# EAGLE board Backplane (EAGLE 9.6.2)
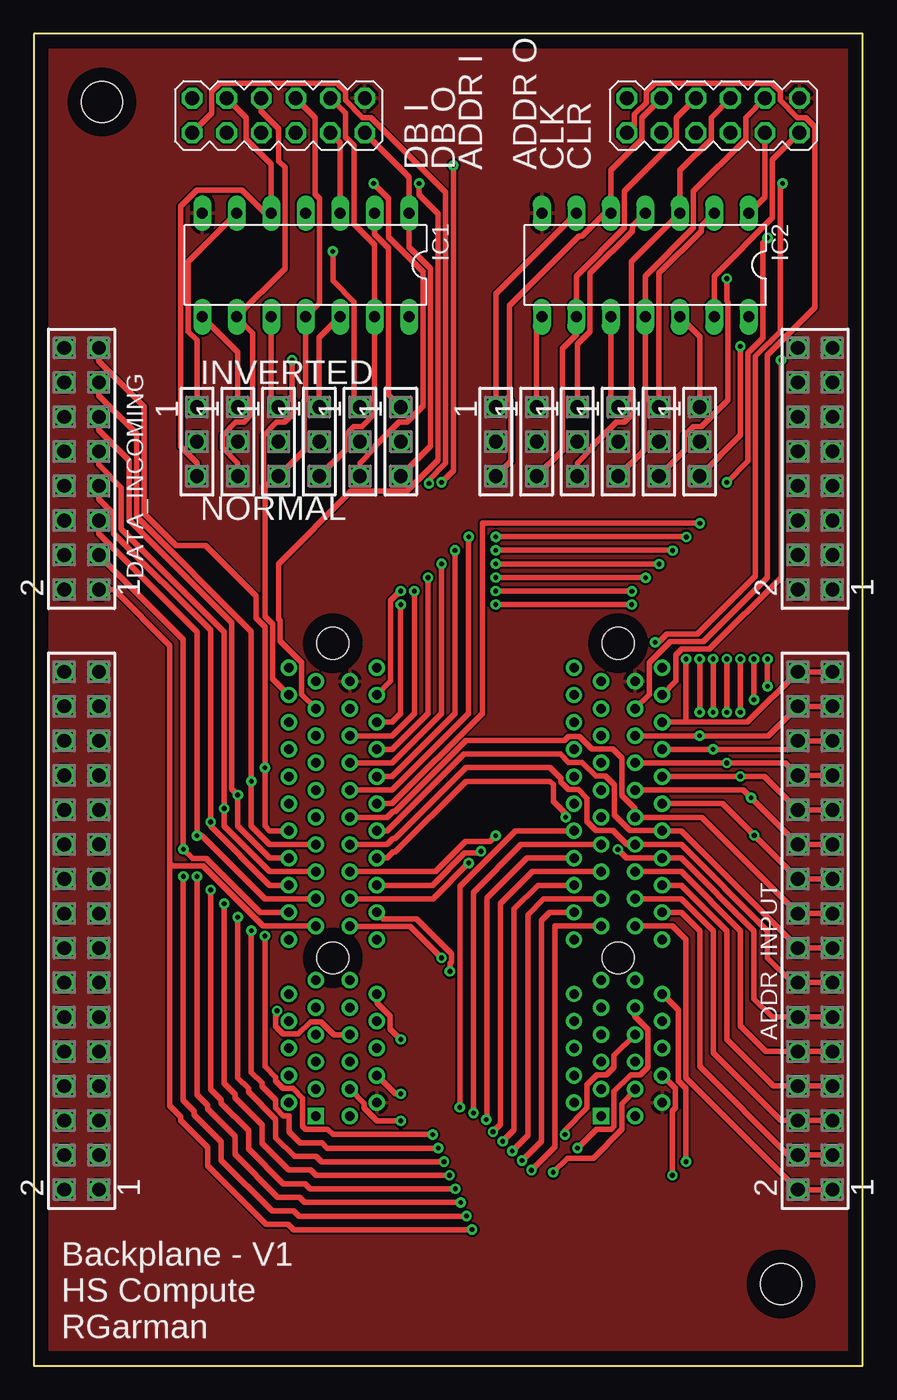
[diagram p0: board, top side]
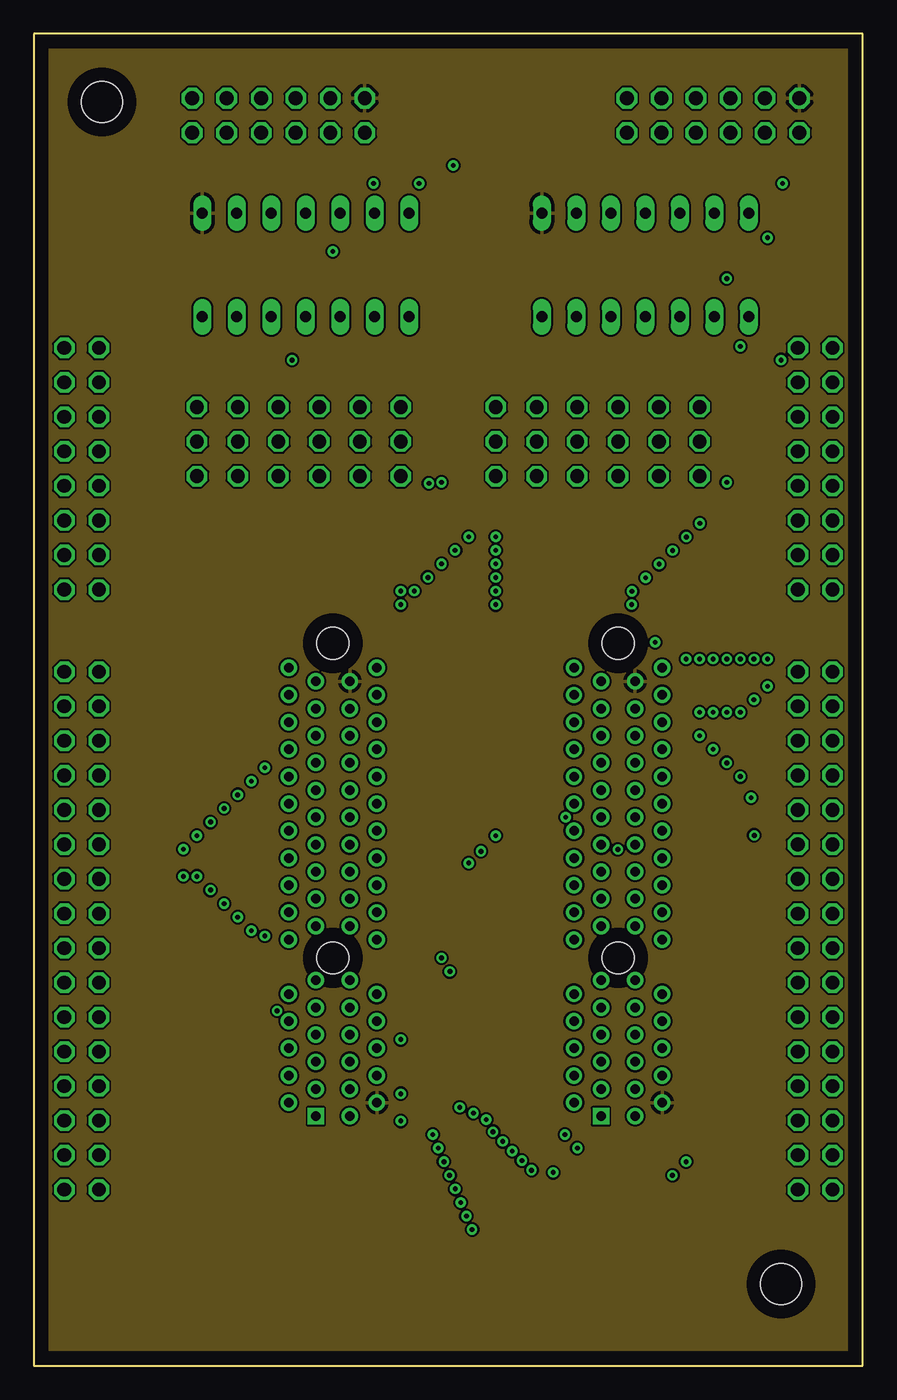
[diagram p1: board, inner layer Route2]
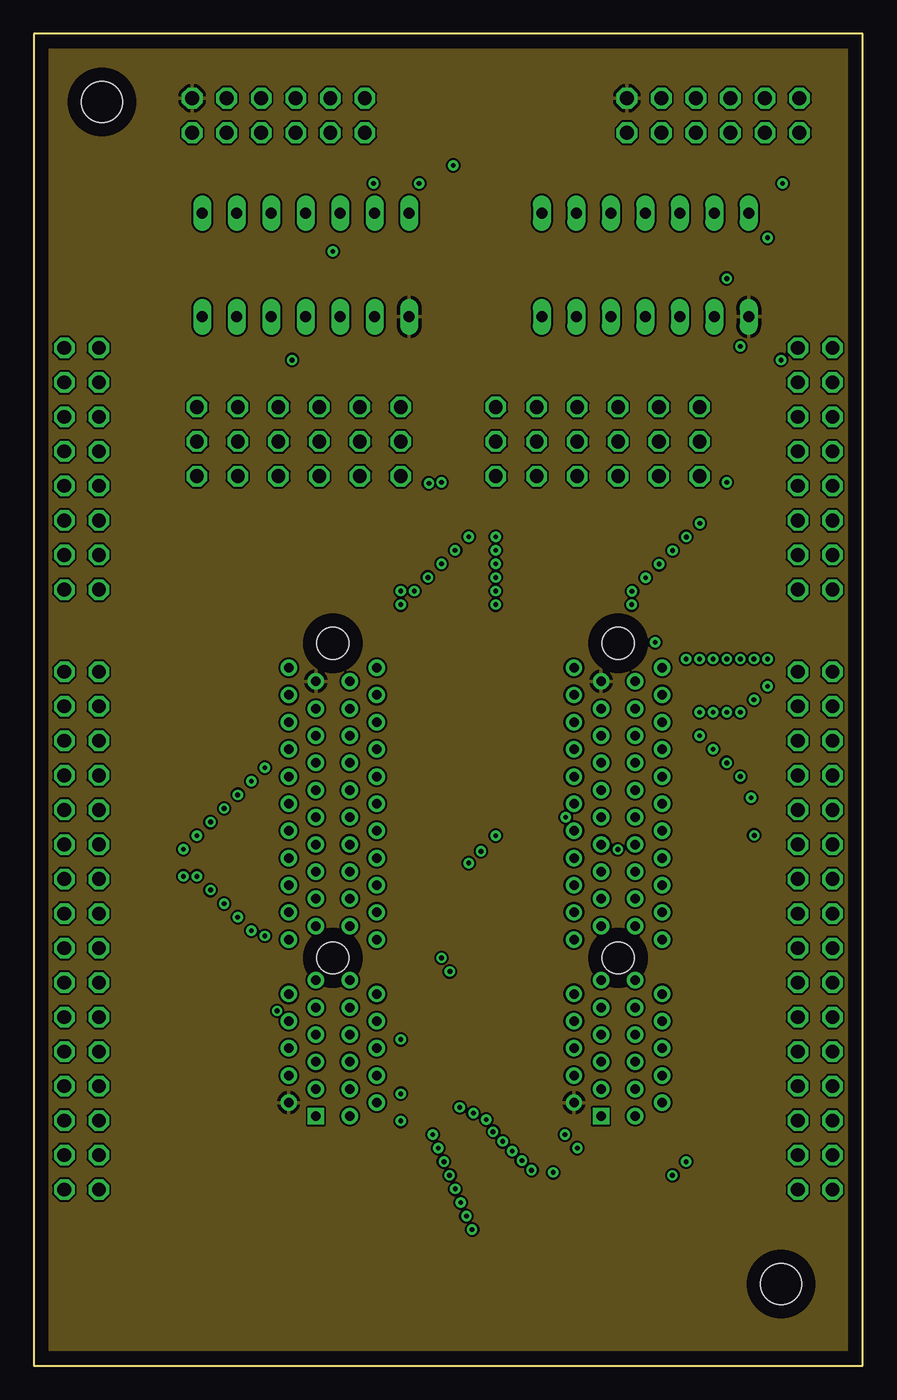
[diagram p2: board, inner layer Route15]
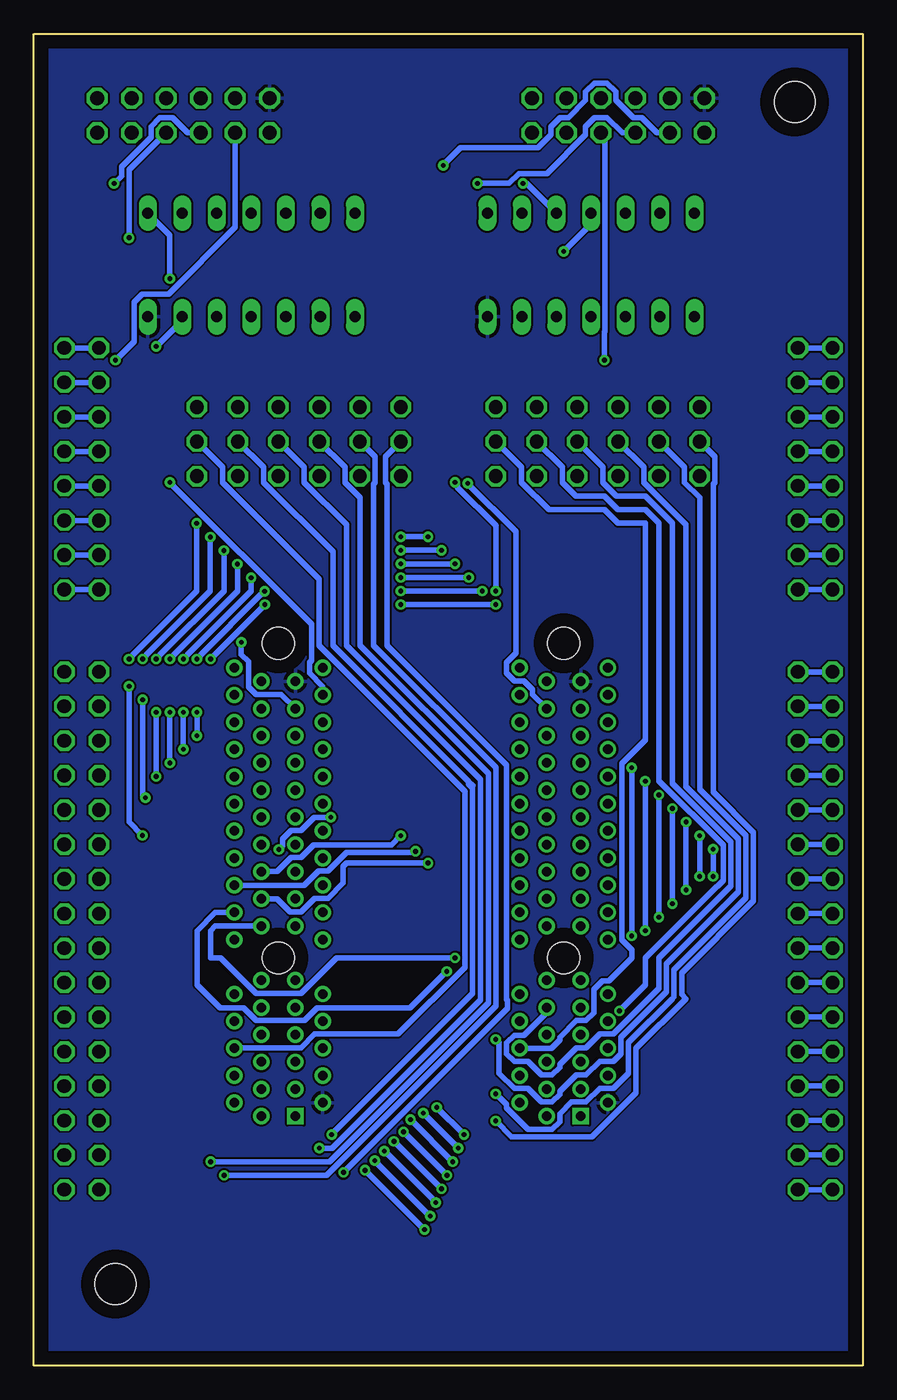
[diagram p3: board, bottom side, seen from below]

Size 61 x 98 mm. Coordinates in mm from the lower left corner, seen from the top.
Outline: 0,0 61,0 61,98 0,98 0,0
Copper layers (1*16): Top 0.035mm / dielectric 1.5mm / Bottom 0.035mm
Design rules "default *": minimum track width 0.2mm, minimum drill 0.35mm, track to track 6mil, track to pad 6mil, pad to pad 6mil, via to via 6mil, smd to smd 6mil, copper to edge 40mil, drill to drill 6mil, minimum pad ring 10mil, minimum via ring 8mil, stop-mask expansion 4mil, vias tented up to drill 0mil, thermal gap 10mil
Net classes: 0 default: width 0.152 mm
Holes 3 mm at 5,93 55,6

## Footprints (pad centres in the part's own frame; a part is rotated, then mirrored left to right if it is on the bottom)
SSW-116-02-G-D = drill 1 pad 1.5 octagon: 1 -19.05,-1.27; 2 -19.05,1.27; 3 -16.51,-1.27; 4 -16.51,1.27; 5 -13.97,-1.27; 6 -13.97,1.27; 7 -11.43,-1.27; 8 -11.43,1.27; 9 -8.89,-1.27; 10 -8.89,1.27; 11 -6.35,-1.27; 12 -6.35,1.27; 13 -3.81,-1.27; 14 -3.81,1.27; 15 -1.27,-1.27; 16 -1.27,1.27; 17 1.27,-1.27; 18 1.27,1.27; 19 3.81,-1.27; 20 3.81,1.27; 21 6.35,-1.27; 22 6.35,1.27; 23 8.89,-1.27; 24 8.89,1.27; 25 11.43,-1.27; 26 11.43,1.27; 27 13.97,-1.27; 28 13.97,1.27; 29 16.51,-1.27; 30 16.51,1.27; 31 19.05,-1.27; 32 19.05,1.27
SSW-103-02-G-S = drill 1 pad 1.5 octagon: 1 -2.54,0; 2 0,0; 3 2.54,0
SSW-108-02-G-D = drill 1 pad 1.5 octagon: 1 -8.89,-1.27; 2 -8.89,1.27; 3 -6.35,-1.27; 4 -6.35,1.27; 5 -3.81,-1.27; 6 -3.81,1.27; 7 -1.27,-1.27; 8 -1.27,1.27; 9 1.27,-1.27; 10 1.27,1.27; 11 3.81,-1.27; 12 3.81,1.27; 13 6.35,-1.27; 14 6.35,1.27; 15 8.89,-1.27; 16 8.89,1.27
DIL14 = drill 0.813 long: 1 -7.62,-3.81; 2 -5.08,-3.81; 3 -2.54,-3.81; 4 0,-3.81; 5 2.54,-3.81; 6 5.08,-3.81; 7 7.62,-3.81; 8 7.62,3.81; 9 5.08,3.81; 10 2.54,3.81; 11 0,3.81; 12 -2.54,3.81; 13 -5.08,3.81; 14 -7.62,3.81
CONTROL_SIG-INT-FOOT = drill 1.016 octagon: ADDR_IN 1.27,1.27; ADDR_OT 3.81,1.27; CLK 3.81,-1.27; CLR 6.35,-1.27; DB_IN -3.81,1.27; DB_OUT -1.27,1.27; GND 6.35,1.27; GP0 -6.35,-1.27; GP1 -3.81,-1.27; GP2 -1.27,-1.27; GP3 1.27,-1.27; VCC -6.35,1.27
PCI_INTERFACE = drill 0.7 square: A1 -11.65,1.25 | drill 0.7: A2 -10.65,3.25; A3 -9.65,1.25; A4 -8.65,3.25; A5 -7.65,1.25; A6 -6.65,3.25; A7 -5.65,1.25; A8 -4.65,3.25; A9 -3.65,1.25; A10 -2.65,3.25; A11 -1.65,1.25; A12 1.35,3.25; A13 2.35,1.25; A14 3.35,3.25; A15 4.35,1.25; A16 5.35,3.25; A17 6.35,1.25; A18 7.35,3.25; A19 8.35,1.25; A20 9.35,3.25; A21 10.35,1.25; A22 11.35,3.25; A23 12.35,1.25; A24 13.35,3.25; A25 14.35,1.25; A26 15.35,3.25; A27 16.35,1.25; A28 17.35,3.25; A29 18.35,1.25; A30 19.35,3.25; A31 20.35,1.25; A32 21.35,3.25; B1 -11.65,-1.25; B2 -10.65,-3.25; B3 -9.65,-1.25; B4 -8.65,-3.25; B5 -7.65,-1.25; B6 -6.65,-3.25; B7 -5.65,-1.25; B8 -4.65,-3.25; B9 -3.65,-1.25; B10 -2.65,-3.25; B11 -1.65,-1.25; B12 1.35,-3.25; B13 2.35,-1.25; B14 3.35,-3.25; B15 4.35,-1.25; B16 5.35,-3.25; B17 6.35,-1.25; B18 7.35,-3.25; B19 8.35,-1.25; B20 9.35,-3.25; B21 10.35,-1.25; B22 11.35,-3.25; B23 12.35,-1.25; B24 13.35,-3.25; B25 14.35,-1.25; B26 15.35,-3.25; B27 16.35,-1.25; B28 17.35,-3.25; B29 18.35,-1.25; B30 19.35,-3.25; B31 20.35,-1.25; B32 21.35,-3.25 | hole 2.35: 0,0; 23.15,0

## Placement (x,y rotation side)
ADDR_INPUT  SSW-116-02-G-D  [SSW-116-02-G-D]  57.5,32 90 top
ADDR_IN~  SSW-103-02-G-S  [SSW-103-02-G-S]  18,68 270 top
ADDR_IN~1  SSW-103-02-G-S  [SSW-103-02-G-S]  40,68 270 top
ADDR_OUT~  SSW-103-02-G-S  [SSW-103-02-G-S]  21,68 270 top
ADDR_OUT~1  SSW-103-02-G-S  [SSW-103-02-G-S]  43,68 270 top
CLK_INV  SSW-103-02-G-S  [SSW-103-02-G-S]  24,68 270 top
CLK_INV1  SSW-103-02-G-S  [SSW-103-02-G-S]  46,68 270 top
CLR_INV  SSW-103-02-G-S  [SSW-103-02-G-S]  27,68 270 top
CLR_INV1  SSW-103-02-G-S  [SSW-103-02-G-S]  49,68 270 top
DATA_INCOMING  SSW-108-02-G-D  [SSW-108-02-G-D]  3.5,66 90 top
DB_IN~  SSW-103-02-G-S  [SSW-103-02-G-S]  12,68 270 top
DB_IN~1  SSW-103-02-G-S  [SSW-103-02-G-S]  34,68 270 top
DB_OUT~  SSW-103-02-G-S  [SSW-103-02-G-S]  15,68 270 top
DB_OUT~1  SSW-103-02-G-S  [SSW-103-02-G-S]  37,68 270 top
IC1  74AC04N  [DIL14]  20,81 180 top
IC2  74AC04N  [DIL14]  45,81 180 top
SIG_FROM_CTRL-  CONTROL_SIG-INT  [CONTROL_SIG-INT-FOOT]  18,92 0 top
SIG_FROM_CTRL-1  CONTROL_SIG-INT  [CONTROL_SIG-INT-FOOT]  50,92 0 top
U$1  BACKPLATE_INTERFACEHEADER  [PCI_INTERFACE]  43,30 90 top
U$2  BACKPLATE_INTERFACEHEADER  [PCI_INTERFACE]  22,30 90 top
X3  SSW-108-02-G-D  [SSW-108-02-G-D]  57.5,66 90 top
X4  SSW-116-02-G-D  [SSW-116-02-G-D]  3.5,32 90 top

## Library data of the parts
ADDR_INPUT X4 = con-samtec; MF: Samtec Inc.; MPN: SSW-116-02-G-D; OC_FARNELL: unknown; OC_NEWARK: 11P9577
ADDR_IN~ ADDR_IN~1 ADDR_OUT~ ADDR_OUT~1 CLK_INV CLK_INV1 CLR_INV CLR_INV1 DB_IN~ DB_IN~1 DB_OUT~ DB_OUT~1 = con-samtec; MF: Samtec Inc.; MPN: SSW-103-02-G-S; OC_FARNELL: unknown; OC_NEWARK: 11P9367
DATA_INCOMING X3 = con-samtec; MF: Samtec Inc.; MPN: SSW-108-02-G-D; OC_FARNELL: unknown; OC_NEWARK: 85K7646
IC1 IC2 = 74xx-eu
SIG_FROM_CTRL- SIG_FROM_CTRL-1 U$1 U$2 = Computer

## Nets
ADDR0: ADDR_INPUT.1 ADDR_INPUT.2 U$1.B13 U$2.B13
ADDR1: ADDR_INPUT.3 ADDR_INPUT.4 U$1.B14 U$2.B14
ADDR2: ADDR_INPUT.5 ADDR_INPUT.6 U$1.B15 U$2.B15
ADDR3: ADDR_INPUT.7 ADDR_INPUT.8 U$1.B16 U$2.B16
ADDR4: ADDR_INPUT.9 ADDR_INPUT.10 U$1.B17 U$2.B17
ADDR5: ADDR_INPUT.11 ADDR_INPUT.12 U$1.B18 U$2.B18
ADDR6: ADDR_INPUT.13 ADDR_INPUT.14 U$1.B19 U$2.B19
ADDR7: ADDR_INPUT.15 ADDR_INPUT.16 U$1.B20 U$2.B20
ADDR8: ADDR_INPUT.17 ADDR_INPUT.18 U$1.B21 U$2.B21
ADDR9: ADDR_INPUT.19 ADDR_INPUT.20 U$1.B22 U$2.B22
ADDR10: ADDR_INPUT.21 ADDR_INPUT.22 U$1.B23 U$2.B23
ADDR11: ADDR_INPUT.23 ADDR_INPUT.24 U$1.B24 U$2.B24
ADDR12: ADDR_INPUT.25 ADDR_INPUT.26 U$1.B25 U$2.B25
ADDR13: ADDR_INPUT.27 ADDR_INPUT.28 U$1.B26 U$2.B26
ADDR14: ADDR_INPUT.29 ADDR_INPUT.30 U$1.B27 U$2.B27
ADDR15: ADDR_INPUT.31 ADDR_INPUT.32 U$1.B28 U$2.B28
DB0: DATA_INCOMING.1 DATA_INCOMING.2 U$1.A13 U$2.A13
DB1: DATA_INCOMING.3 DATA_INCOMING.4 U$1.A14 U$2.A14
DB2: DATA_INCOMING.5 DATA_INCOMING.6 U$1.A15 U$2.A15
DB3: DATA_INCOMING.7 DATA_INCOMING.8 U$1.A16 U$2.A16
DB4: DATA_INCOMING.9 DATA_INCOMING.10 U$1.A17 U$2.A17
DB5: DATA_INCOMING.11 DATA_INCOMING.12 U$1.A18 U$2.A18
DB6: DATA_INCOMING.13 DATA_INCOMING.14 U$1.A19 U$2.A19
DB7: DATA_INCOMING.15 DATA_INCOMING.16 U$1.A20 U$2.A20
GND: IC1.7 IC2.7 SIG_FROM_CTRL-1.GND SIG_FROM_CTRL-.GND U$1.B2 U$1.B31 U$2.B2 U$2.B31
N$1: CLR_INV.2 U$2.B6
N$2: CLR_INV.3 IC1.1 SIG_FROM_CTRL-.CLR
N$3: CLK_INV.2 U$2.B7
N$4: DB_IN~.2 U$2.B3
N$5: DB_OUT~.2 U$2.B4
N$6: SIG_FROM_CTRL-.GP0 U$2.B29
N$7: SIG_FROM_CTRL-.GP1 U$2.B30
N$8: CLK_INV.3 IC1.3 SIG_FROM_CTRL-.CLK
N$9: DB_IN~.3 IC1.5 SIG_FROM_CTRL-.DB_IN
N$10: DB_OUT~.3 IC1.9 SIG_FROM_CTRL-.DB_OUT
N$11: SIG_FROM_CTRL-.GP2 U$2.A29
N$12: SIG_FROM_CTRL-.GP3 U$2.A30
N$13: ADDR_OUT~.3 IC1.13 SIG_FROM_CTRL-.ADDR_OT
N$14: ADDR_IN~.1 IC1.10
N$15: CLR_INV.1 IC1.2
N$16: CLK_INV.1 IC1.4
N$17: DB_IN~.1 IC1.6
N$18: DB_OUT~.1 IC1.8
N$19: ADDR_IN~.3 IC1.11 SIG_FROM_CTRL-.ADDR_IN
N$20: ADDR_OUT~.1 IC1.12
N$21: ADDR_OUT~.2 U$2.B9
N$22: ADDR_IN~.2 U$2.B10
N$33: X3.1 X3.2
N$34: X3.3 X3.4
N$35: X3.5 X3.6
N$36: X3.7 X3.8
N$37: X3.9 X3.10
N$38: X3.11 X3.12
N$39: X3.13 X3.14
N$40: X3.15 X3.16
N$41: X4.1 X4.2
N$42: X4.3 X4.4
N$43: X4.5 X4.6
N$44: X4.7 X4.8
N$45: X4.9 X4.10
N$46: X4.11 X4.12
N$47: X4.13 X4.14
N$48: X4.15 X4.16
N$49: X4.17 X4.18
N$50: X4.19 X4.20
N$51: X4.21 X4.22
N$52: X4.23 X4.24
N$53: X4.25 X4.26
N$54: X4.27 X4.28
N$55: X4.29 X4.30
N$56: X4.31 X4.32
N$57: CLR_INV1.3 IC2.13 SIG_FROM_CTRL-1.CLR
N$58: CLK_INV1.3 IC2.1 SIG_FROM_CTRL-1.CLK
N$59: DB_IN~1.3 IC2.5 SIG_FROM_CTRL-1.DB_IN
N$60: DB_OUT~1.3 IC2.9 SIG_FROM_CTRL-1.DB_OUT
N$61: CLK_INV1.1 IC2.2
N$62: ADDR_IN~1.1 IC2.4
N$63: DB_IN~1.1 IC2.6
N$64: DB_OUT~1.1 IC2.8
N$65: ADDR_OUT~1.3 IC2.11 SIG_FROM_CTRL-1.ADDR_OT
N$66: ADDR_IN~1.3 IC2.3 SIG_FROM_CTRL-1.ADDR_IN
N$67: ADDR_OUT~1.1 IC2.10
N$68: CLR_INV1.1 IC2.12
N$79: CLK_INV1.2 U$1.B7
N$80: CLR_INV1.2 U$1.B6
N$81: DB_IN~1.2 U$1.B3
N$82: DB_OUT~1.2 U$1.B4
N$83: ADDR_OUT~1.2 U$1.B9
N$84: ADDR_IN~1.2 U$1.B10
N$85: SIG_FROM_CTRL-1.GP0 U$1.B29
N$86: SIG_FROM_CTRL-1.GP1 U$1.B30
N$87: SIG_FROM_CTRL-1.GP2 U$1.A29
N$88: SIG_FROM_CTRL-1.GP3 U$1.A30
VCC: IC1.14 IC2.14 SIG_FROM_CTRL-1.VCC SIG_FROM_CTRL-.VCC U$1.A2 U$1.A31 U$2.A2 U$2.A31

## Tracks (layer width: path | path; a pad name or v marks a point on that pad's centre or on a via)
ADDR0  (via drill 0.35)
  Top 0.406: ADDR_INPUT.1 ADDR_INPUT.2 48,21.18 48,31.35 47,32.35 U$1.B13 44.04,32.35 | U$2.B13 23.29,32.31 27.69,32.31 v30,30
  Bottom 0.406: U$1.B13 47.65,32.35 48,32 48,30 47.26,30 44.65,27.39 41.35,27.39 38.74,30 v30,30
ADDR1  (via drill 0.35)
  Top 0.406: U$1.B14 47.65,33.35 49,32 49,22 55.51,15.49 ADDR_INPUT.4 ADDR_INPUT.3 | U$2.B14 25.73,32.87 28.17,32.87 30.73,30.3 30.73,29.7 30.62,29.58 v30.62,29
  Bottom 0.406: U$1.B14 47.65,33.35 49,32 49,28 47.31,26.31 45.57,26.31 44.65,25.39 41.07,25.39 40.15,26.31 35,26.31 34.69,26.31 33.31,26.31 v30.62,29
ADDR2  (via drill 0.35)
  Top 0.406: U$1.B15 47.65,34.35 50,32 50,23 54.97,18.03 ADDR_INPUT.6 ADDR_INPUT.5 | v32,36.98 29.37,34.35 U$2.B15
  Bottom 0.406: U$1.B15 43.11,34.35 42.15,33.39 41.35,33.39 40.35,34.39 39.35,34.39 38.23,35.51 38.23,36.73 37.98,36.98 v32,36.98
ADDR3  (via drill 0.35)
  Top 0.406: ADDR_INPUT.7 ADDR_INPUT.8 54.43,20.57 51,24 51,32 47.65,35.35 U$1.B16 | v32.91,37.84 32.78,37.71 31.7,37.71 29.33,35.35 U$2.B16
  Bottom 0.406: U$1.B16 41.11,35.35 40.07,36.39 39.35,36.39 38.79,36.95 38.79,36.96 38,37.75 33,37.75 v32.91,37.84
ADDR4  (via drill 0.35)
  Top 0.406: U$1.B17 47.65,36.35 52,32 52,25 53.89,23.11 ADDR_INPUT.10 ADDR_INPUT.9 | U$2.B17 29.54,36.35 31.77,38.58 33.58,38.58 v34,39
  Bottom 0.406: U$1.B17 43.11,36.35 42.07,37.39 41.35,37.39 40.43,38.31 34.69,38.31 v34,39
ADDR5  (via drill 0.35)
  Top 0.406: ADDR_INPUT.11 ADDR_INPUT.12 54.35,25.65 53,27 53,32 47.65,37.35 U$1.B18 43.61,37.35 v42.98,37.98 | U$2.B18 26,37.35 26.44,37.79 26.58,37.79 31.79,43 38,43 38.23,42.77 38.23,41.51 39.15,40.6 v39.15,40.35
  Bottom 0.406: v42.98,37.98 42.71,38.25 42.71,38.75 42.07,39.39 41.35,39.39 40.39,40.35 v39.15,40.35
ADDR6
  Top 0.406: ADDR_INPUT.13 ADDR_INPUT.14 55.81,28.19 54,30 54,32 47.65,38.35 U$1.B19 43.65,38.35 42.61,39.39 41.35,39.39 40.71,40.03 40.71,41.75 40.07,42.39 39.35,42.39 38.79,42.95 38.79,43.21 38,44 31.79,44 26.58,38.79 26.44,38.79 26,38.35 U$2.B19
ADDR7
  Top 0.406: ADDR_INPUT.15 ADDR_INPUT.16 56.23,30.77 47.65,39.35 U$1.B20 46.21,39.39 43.85,39.39 42.73,40.51 42.73,42.73 42.07,43.39 41.35,43.39 40.35,44.39 39.35,44.39 38.74,45 31.65,45 26,39.35 U$2.B20
ADDR8
  Top 0.406: ADDR_INPUT.17 ADDR_INPUT.18 49.15,40.35 U$1.B21 44.25,40.99 43.29,41.95 43.29,44.71 42.61,45.39 41.07,45.39 40.15,46.31 39.35,46.31 39.04,46 31.79,46 26.58,40.79 26.44,40.79 26,40.35 U$2.B21
ADDR9  (via drill 0.35)
  Top 0.406: U$1.B22 50.69,41.35 v53.02,39.02 ADDR_INPUT.20 ADDR_INPUT.19 | U$2.B22 26.35,41.35 33,48 33,62 49,62 v49.02,61.98 | v54,50 v54,52
  Bottom 0.406: v53.02,39.02 54,40 v54,50 | v54,52 53.73,52.27 53.73,52.3 49.02,57.02 v49.02,61.98
ADDR10  (via drill 0.35)
  Top 0.406: U$1.B23 52.23,42.35 v52.79,41.79 ADDR_INPUT.22 ADDR_INPUT.21 | U$2.B23 26.35,42.35 32,48 v32,61 | v53,49 v53,52 | v48.02,60.98 48,61 v34,61
  Bottom 0.406: v52.79,41.79 53,42 v53,49 | v32,61 v34,61 | v53,52 52.73,52.27 52.73,52.3 48.02,57.02 v48.02,60.98
ADDR11  (via drill 0.35)
  Top 0.406: U$1.B24 v52,43.35 53.77,43.35 ADDR_INPUT.24 ADDR_INPUT.23 | U$2.B24 26.35,43.35 31,48 v31,60 | v52,48.08 v52,52 | v34,60 47,60 v47.02,59.98
  Bottom 0.406: v52,43.35 v52,48.08 | v52,52 51.73,52.27 51.73,52.3 47.02,57.02 v47.02,59.98 | v31,60 v34,60
ADDR12  (via drill 0.35)
  Top 0.406: U$1.B25 v51,44.35 55.31,44.35 ADDR_INPUT.26 ADDR_INPUT.25 | U$2.B25 26.35,44.35 30,48 v30,59 | v51,48.08 v51,52 | v46.02,58.98 46,59 v34,59
  Bottom 0.406: v51,44.35 v51,48.08 | v30,59 v34,59 | v51,52 50.73,52.27 50.73,52.3 46.02,57.02 v46.02,58.98
ADDR13  (via drill 0.35)
  Top 0.406: U$1.B26 v50,45.35 55.61,45.35 ADDR_INPUT.28 ADDR_INPUT.27 | U$2.B26 26.35,45.35 29,48 v29,58 | v50,48.08 v50,52 | v45.02,57.98 45,58 v34,58
  Bottom 0.406: v50,45.35 v50,48.08 | v29,58 v34,58 | v50,52 49.73,52.27 49.73,52.3 45.02,57.02 v45.02,57.98
ADDR14  (via drill 0.35)
  Top 0.406: U$1.B27 v49,46.35 54.07,46.35 ADDR_INPUT.30 ADDR_INPUT.29 | U$2.B27 26.35,46.35 28,48 v28,57 | v34,57 44,57 v44.02,56.98 | v49,52 v49,48.08
  Bottom 0.406: v49,46.35 v49,48.08 | v34,57 v28,57 | v44.02,56.98 44.27,56.73 44.3,56.73 48.73,52.3 48.73,52.27 v49,52
ADDR15  (via drill 0.35)
  Top 0.406: U$1.B28 48,47.35 | 48,47.35 52.53,47.35 ADDR_INPUT.32 ADDR_INPUT.31 | U$2.B28 26.35,47.35 27,48 v27,56 | 48,47.35 v48,52 | v34,56 v44,56
  Bottom 0.406: v34,56 v27,56 | v44,56 v48,52
DB0  (via drill 0.35)
  Top 0.406: U$1.A13 38.35,32.35 38.35,16.1 v36.62,14.38 | DATA_INCOMING.1 5.89,57.11 10,53 10,37 | v32.25,10 19.1,10 18.71,10.39 17.1,10.39 12.79,14.7 12.79,16.05 10.79,18.05 10.79,18.31 10,19.1 10,37 | U$2.A13 16.86,32.35 12.44,36.77 10.23,36.77 10,37
  Bottom 0.406: U$1.A13 41.71,32.31 | DATA_INCOMING.1 DATA_INCOMING.2 | v36.62,14.38 v32.25,10
DB1  (via drill 0.35)
  Top 0.406: U$1.A14 37.94,33.35 37.35,32.76 37.35,16.52 v35.92,15.08 | v31.84,11 19.52,11 19.12,11.39 17.51,11.39 13.79,15.11 13.79,16.47 11.79,18.47 11.79,18.72 11,19.52 v11,36 | U$2.A14 16.65,33.35 12.67,37.33 11.67,37.33 v11,38 11,53.42 DATA_INCOMING.3
  Bottom 0.406: v11,36 v11,38 | DATA_INCOMING.4 DATA_INCOMING.3 | v35.92,15.08 v31.84,11
DB2  (via drill 0.35)
  Top 0.406: U$1.A15 37.52,34.35 36.35,33.18 36.35,16.93 v35.21,15.79 | DATA_INCOMING.5 4.77,61.23 12,54 v12,39 12.35,39 17,34.35 U$2.A15 | v31.42,12 19.93,12 19.54,12.39 17.93,12.39 14.79,15.53 14.79,16.88 12.79,18.88 12.79,19.14 12,19.93 v12,36
  Bottom 0.406: v12,36 v12,39 | DATA_INCOMING.5 DATA_INCOMING.6 | v35.21,15.79 v31.42,12
DB3  (via drill 0.35)
  Top 0.406: U$2.A16 17.35,35.35 13,39.7 v13,40 13,54.12 5.88,61.24 5.88,62.65 4.77,63.76 DATA_INCOMING.7 | U$1.A16 37.11,35.35 35.35,33.59 35.35,17.34 v34.5,16.5 | v31.01,13 20.34,13 19.95,13.39 18.34,13.39 15.79,15.94 15.79,17.3 13.79,19.3 13.79,19.55 13,20.34 v13,35
  Bottom 0.406: v13,35 v13,40 | DATA_INCOMING.8 DATA_INCOMING.7 | v34.5,16.5 v31.01,13
DB4  (via drill 0.35)
  Top 0.406: U$2.A17 17.35,36.35 14,39.7 v14,41 14,54 6.44,61.56 6.44,64.63 4.77,66.3 DATA_INCOMING.9 | U$1.A17 36.69,36.35 34.35,34.01 34.35,17.76 v33.8,17.2 | v30.59,14 20.76,14 20.37,14.39 18.76,14.39 16.79,16.36 16.79,17.71 14.79,19.71 14.79,19.97 14,20.76 v14,34
  Bottom 0.406: v14,34 v14,41 | DATA_INCOMING.9 DATA_INCOMING.10 | v33.8,17.2 v30.59,14
DB5  (via drill 0.35)
  Top 0.406: U$2.A18 17.35,37.35 15,39.7 v15,42 14.56,42.44 14.56,54.68 7,62.24 7,66.61 4.77,68.84 DATA_INCOMING.11 | U$1.A18 36.28,37.35 33.35,34.42 33.35,18.17 v33.28,18.11 | v30.18,15 21.17,15 20.78,15.39 19.17,15.39 17.79,16.77 17.79,18.12 15.79,20.12 15.79,20.38 15,21.17 v15,33
  Bottom 0.406: v15,33 v15,42 | DATA_INCOMING.12 DATA_INCOMING.11 | v33.28,18.11 v30.18,15
DB6  (via drill 0.35)
  Top 0.406: U$2.A19 17.35,38.35 16,39.7 v16,43 16,54.02 7.56,62.47 7.56,68.59 4.77,71.38 DATA_INCOMING.13 | U$1.A19 35.87,38.35 32.35,34.84 v32.35,18.59 | v29.76,16 21.59,16 21.2,16.39 19.58,16.39 18.79,17.18 18.79,18.39 18.35,18.39 17.79,18.95 17.79,19.54 16.79,20.54 16.79,20.8 16,21.59 v16,32
  Bottom 0.406: v16,32 v16,43 | DATA_INCOMING.13 DATA_INCOMING.14 | v32.35,18.59 v29.76,16
DB7  (via drill 0.35)
  Top 0.406: U$2.A20 17.35,39.35 17,39.7 v17,44 17,54.35 16.35,55 16.35,56.62 12.62,60.35 10.46,60.35 8.12,62.7 8.12,70.57 4.77,73.92 DATA_INCOMING.15 | v31.35,19 31.35,35.25 35.45,39.35 U$1.A20 | v29.35,17 22,17 21.61,17.39 20,17.39 19.79,17.6 19.79,19.67 19.07,20.39 18.35,20.39 17.79,20.95 17.79,21.21 17,22 v17,31.62
  Bottom 0.406: v17,31.62 v17,44 | DATA_INCOMING.16 DATA_INCOMING.15 | v31.35,19 v29.35,17
GND
  pour Route2: 0,98 61,98 61,0 0,0
  pour Top: 0,98 61,98 61,0 0,0
N$1
  Bottom 0.406: CLR_INV.2 25.11,66.11 25.11,65 23.11,63 19,63 18,62 16,62 16,46.04 17.73,44.3 17.73,31.31 17,30.58 17,30 18.69,28.31 19.15,28.31 19.79,27.67 19.79,25.95 20.35,25.39 21.07,25.39 22.29,24.17 22.29,23.95 22.89,23.35 U$2.B6
N$2
  Top 0.406: SIG_FROM_CTRL-.CLR 27.62,87.46 IC1.1 27.62,82.31 29.2,80.73 29.2,67.66 CLR_INV.3
N$3  (via drill 0.35)
  Top 0.406: v17.9,26.1 17.9,25.86 17.79,25.75 17.79,24.95 18.35,24.39 19.43,24.39 20.35,25.31 21.15,25.31 22.11,24.35 U$2.B7
  Bottom 0.406: CLK_INV.2 22.11,66.11 22.11,65 21.11,64 19,64 18,63 16,63 15,62 15,43.04 10.27,38.3 10.27,35.7 10.7,35.27 10.73,35.27 16,30 16,29 16,28 v17.9,26.1
N$4  (via drill 0.35)
  Top 0.406: U$2.B3 24.29,19.31 24.29,18.95 25.24,18 v27,18
  Bottom 0.406: DB_IN~.2 10.89,66.89 10.89,65 11,64.89 11,42.2 8.03,39.23 8.03,34.18 13.32,28.89 13.32,27.32 13,27 16.67,23.33 16.67,20.07 19.91,16.83 25.83,16.83 v27,18
N$5  (via drill 0.35)
  Top 0.406: v27,20 26.6,20 U$2.B4
  Bottom 0.406: DB_OUT~.2 13.11,66.11 13.11,65 12,63.89 12,42.41 8.59,39 8.59,34.41 13.88,29.12 13.88,27.12 14,27 17.23,23.77 17.23,21.51 18.35,20.39 19.35,20.39 20.35,19.39 21.42,19.39 22.29,18.52 22.29,17.95 22.85,17.39 24.65,17.39 26.21,18.95 26.21,19.21 v27,20
N$6  (via drill 0.35)
  Top 0.406: SIG_FROM_CTRL-.GP0 13.07,92.15 13.07,93.73 13.73,94.39 22.27,94.39 22.93,93.73 22.93,93.11 24.19,91.85 24.81,91.85 30.31,86.35 30.31,66.41 29.07,65.17 v29.07,64.93
  Bottom 0.406: U$2.B29 24.29,49.39 24.29,49.75 24.93,50.39 25.65,50.39 26.21,50.95 26.21,51.75 25.53,52.42 25.53,61.38 v29.07,64.93
N$7  (via drill 0.35)
  Top 0.406: U$2.B30 26.27,50.37 26.27,56.3 26.7,56.73 26.73,56.73 v27,57 | v30,65 30.87,65.87 v30.87,88.33
  Bottom 0.406: v30,65 29.81,64.81 29.81,64.62 27,61.81 v27,57 | SIG_FROM_CTRL-.GP1 15.15,90.73 16.27,91.85 16.89,91.85 18.15,93.11 18.15,93.73 18.81,94.39 19.73,94.39 20.39,93.73 20.39,93.11 21.65,91.85 22.27,91.85 22.93,91.19 22.93,90.57 23.89,89.61 29.59,89.61 v30.87,88.33
N$8  (via drill 0.35)
  Top 0.406: SIG_FROM_CTRL-.CLK 22.54,90 IC1.3 | CLK_INV.3 24,66.43 25.11,67.54 25.11,67.68 26.86,69.43 27.46,69.43 28.64,70.61 28.64,80.5 26.1,83.04 26.1,85.89 25,86.99 v25,87
  Bottom 0.406: v25,87 24.73,87 IC1.3
N$9
  Top 0.406: SIG_FROM_CTRL-.DB_IN 15.61,91.85 15.61,90.27 17.46,88.42 IC1.5 17.02,84.81 15.34,86.49 11.96,86.49 10.8,85.33 10.8,67.63 12,66.43 DB_IN~.3
N$10
  Top 0.406: SIG_FROM_CTRL-.DB_OUT 16.73,92.31 18.02,91.02 18.02,88.65 18.48,88.19 18.48,80.75 IC1.9 16.11,76 16.11,70.08 15.46,69.43 14.86,69.43 13.89,68.46 13.89,67.54 15,66.43 DB_OUT~.3
N$11  (via drill 0.35)
  Top 0.406: U$2.A29 19.71,49.39 19.71,51.75 18.12,53.34 18.12,54.82 18,54.93 18,59 23.35,64.35 27.46,64.35 29.75,66.64 29.75,84.77 28.35,86.17 v28.35,87
  Bottom 0.406: v28.35,87 26.04,87 25.3,87.73 23.23,87.73 20.39,90.57 20.39,91.19 19.73,91.85 18.81,91.85 17.69,90.73 SIG_FROM_CTRL-.GP2
N$12  (via drill 0.35)
  Top 0.406: U$2.A30 17.56,50.54 17.56,54.58 17,55.14 17,64.89 16.89,65 16.89,68.46 17.86,69.43 18.46,69.43 19.11,70.08 19.11,71 19,71.11 v19,74
  Bottom 0.406: v19,74 19,76.09 18.98,76.11 18.98,90.44 SIG_FROM_CTRL-.GP3
N$13
  Top 0.406: SIG_FROM_CTRL-.ADDR_OT 22.93,92.15 22.93,90.4 23.56,89.77 23.56,84 25.08,82.48 IC1.13 25.08,71.03 25.11,71 25.11,70.08 24.14,69.11 23.54,69.11 22.89,68.46 22.89,67.35 ADDR_OUT~.3
N$14
  Top 0.406: ADDR_IN~.1 17.46,71.08 IC1.10
N$15
  Top 0.406: IC1.2 25.08,83.27 26.1,82.25 26.1,71.44 CLR_INV.1
N$16  (via drill 0.35)
  Top 0.406: v22,82 22,79.83 23.56,78.27 23.56,70.98 CLK_INV.1
  Bottom 0.406: v22,82 20,84 IC1.4
N$17
  Top 0.406: DB_IN~.1 12,75.47 11.36,76.11 11.36,81.25 IC1.6
N$18
  Top 0.406: DB_OUT~.1 15,74.57 IC1.8
N$19
  Top 0.406: SIG_FROM_CTRL-.ADDR_IN 20.69,91.85 20.69,86.22 21.02,85.89 21.02,78.21 IC1.11 | IC1.11 20,78 | IC1.11 20,71.11 19.89,71 19.89,67.35 ADDR_IN~.3
N$20
  Top 0.406: ADDR_OUT~.1 21,75.65 IC1.12
N$21
  Bottom 0.406: ADDR_OUT~.2 19.11,66.11 19.11,65 18.11,64 16,64 14,62 14,42.83 9.71,38.53 9.71,35.29 15,30 15,27.74 18.35,24.39 19.35,24.39 20.35,23.39 21.07,23.39 22.29,22.17 22.29,21.95 22.85,21.39 23.65,21.39 24.65,22.39 25.65,22.39 26.21,22.95 26.21,23.75 25.65,24.31 24.93,24.31 23.25,25.99 U$2.B9
N$22  (via drill 0.35)
  Top 0.406: v27,24 26.21,24.79 26.21,25.75 25.25,26.71 U$2.B10
  Bottom 0.406: ADDR_IN~.2 16.11,66.11 16.11,65 13,61.89 13,42.62 9.15,38.77 9.15,34.85 14.44,29.56 14.44,27.51 17.79,24.16 17.79,22.95 18.35,22.39 19.35,22.39 20.35,21.39 21.07,21.39 22.29,20.17 22.29,19.95 22.85,19.39 23.65,19.39 24.65,20.39 25.65,20.39 26.77,21.51 26.77,23.77 v27,24
N$33
  Bottom 0.406: X3.1 X3.2
N$34
  Bottom 0.406: X3.4 X3.3
N$35
  Bottom 0.406: X3.5 X3.6
N$36
  Bottom 0.406: X3.8 X3.7
N$37
  Bottom 0.406: X3.9 X3.10
N$38
  Bottom 0.406: X3.12 X3.11
N$39
  Bottom 0.406: X3.13 X3.14
N$40
  Bottom 0.406: X3.16 X3.15
N$41
  Bottom 0.406: X4.2 X4.1
N$42
  Bottom 0.406: X4.3 X4.4
N$43
  Bottom 0.406: X4.6 X4.5
N$44
  Bottom 0.406: X4.7 X4.8
N$45
  Bottom 0.406: X4.10 X4.9
N$46
  Bottom 0.406: X4.11 X4.12
N$47
  Bottom 0.406: X4.14 X4.13
N$48
  Bottom 0.406: X4.15 X4.16
N$49
  Bottom 0.406: X4.18 X4.17
N$50
  Bottom 0.406: X4.19 X4.20
N$51
  Bottom 0.406: X4.22 X4.21
N$52
  Bottom 0.406: X4.23 X4.24
N$53
  Bottom 0.406: X4.26 X4.25
N$54
  Bottom 0.406: X4.28 X4.27
N$55
  Bottom 0.406: X4.29 X4.30
N$56
  Bottom 0.406: X4.32 X4.31
N$57  (via drill 0.35)
  Top 0.406: SIG_FROM_CTRL-1.CLR 54.37,88.75 54.37,84.46 50.08,80.17 IC2.13 | CLR_INV1.3 52,68.46 v52,75
  Bottom 0.406: v52,75 50.08,76.92 IC2.13
N$58  (via drill 0.35)
  Top 0.406: SIG_FROM_CTRL-1.CLK 53.81,86 IC2.1 | v51,80 51,78.37 51.1,78.27 51.1,71.07 49.14,69.11 48.54,69.11 47.89,68.46 47.89,67.35 CLK_INV1.3
  Bottom 0.406: v51,80 51,83.19 IC2.1
N$59
  Top 0.406: SIG_FROM_CTRL-1.DB_IN 44.77,91.85 44.77,90.27 42.46,87.96 42.46,85 | 42.46,85 IC2.5 | DB_IN~1.3 35.11,66.57 35.11,71 35,71.11 35,78 40.13,83.13 40.34,83.13 42.21,85 42.46,85
N$60
  Top 0.406: SIG_FROM_CTRL-1.DB_OUT 47.31,91.85 47.31,90.27 43.48,86.44 43.48,83.73 39.92,80.17 IC2.9 39.92,75.88 38.89,74.85 38.89,67.35 DB_OUT~1.3
N$61
  Top 0.406: CLK_INV1.1 46,76.09 46.02,76.11 46.02,80.4 49.12,83.5 49.12,83.84 IC2.2
N$62
  Top 0.406: IC2.4 44.03,83.84 44.03,83.5 40.94,80.4 40.94,76.11 40,75.17 ADDR_IN~1.1
N$63
  Top 0.406: DB_IN~1.1 34,78.89 IC2.6
N$64
  Top 0.406: DB_OUT~1.1 37,76.81 IC2.8
N$65
  Top 0.406: SIG_FROM_CTRL-1.ADDR_OT 52.39,91.85 52.39,90.27 48.56,86.44 48.56,83.73 45,80.17 IC2.11 45,71.11 44.89,71 44.89,67.35 ADDR_OUT~1.3
N$66
  Top 0.406: SIG_FROM_CTRL-1.ADDR_IN 49.85,91.85 49.85,90.27 47.54,87.96 IC2.3 43.98,81.25 43.98,71.12 44.11,71 44.11,70.08 43.46,69.43 42.86,69.43 41.11,67.68 41.11,67.54 40,66.43 ADDR_IN~1.3
N$67
  Top 0.406: ADDR_OUT~1.1 42.46,71.08 IC2.10
N$68
  Top 0.406: CLR_INV1.1 49,75.73 IC2.12
N$79  (via drill 0.35)
  Top 0.406: v39.08,17 39.08,17.33 40.71,18.95 40.71,20.67 41.43,21.39 42.15,21.39 42.71,21.95 42.71,22.81 U$1.B7
  Bottom 0.406: CLK_INV1.2 44.11,66.11 44.11,65 39,59.89 39,53 29,43 | 29,43 28.68,42.68 | 29,43 29,42.79 28.71,42.5 28.71,27.38 v39.08,17
N$80
  Bottom 0.406: CLR_INV1.2 47.11,66.11 47.11,65 40,57.89 40,53 29.27,42.27 29.27,29.31 34.19,24.39 40.35,24.39 41.35,23.39 46.21,23.39 U$1.B6
N$81  (via drill 0.35)
  Top 0.406: U$1.B3 44.25,20.25 43.27,19.27 43.27,17.37 41.17,15.27 39.27,15.27 v38.21,14.21
  Bottom 0.406: DB_IN~1.2 35.11,66.89 35.11,65 35,64.89 35,53 26.21,44.21 26.21,26.95 26.13,26.87 26.13,26.3 v38.21,14.21
N$82  (via drill 0.35)
  Top 0.406: v47,14 47,18.74 47.21,18.95 47.21,20.39 46.88,20.72 U$1.B4
  Bottom 0.406: DB_OUT~1.2 35.89,66.89 35.89,65 36,64.89 36,53 27,44 27,26.47 39.47,14 v47,14
N$83  (via drill 0.35)
  Top 0.406: v40,16 41.39,17.39 42.5,17.39 42.71,17.6 42.71,20.17 43.93,21.39 44.65,21.39 45.21,21.95 45.21,24.75 44.25,25.71 U$1.B9
  Bottom 0.406: ADDR_OUT~1.2 41.11,66.11 41.11,65 38,61.89 38,53 28.12,43.12 28.12,26.93 39.05,16 v40,16
N$84  (via drill 0.35)
  Top 0.406: v48,15 48,20.39 47.44,20.95 47.44,26.16 U$1.B10
  Bottom 0.406: ADDR_IN~1.2 38.11,66.11 38.11,65 37,63.89 37,53 27.56,43.56 27.56,26.7 39.26,15 v48,15
N$85
  Top 0.406: U$1.B29 45.29,49.39 45.29,51.75 46.84,53.29 49.29,53.29 54,58 54,74.38 57.47,77.85 57.47,91.19 56.81,91.85 56.19,91.85 54.93,93.11 54.93,93.73 54.27,94.39 45.73,94.39 45.07,93.73 45.07,92.94 44.21,92.08 44.21,91.29 SIG_FROM_CTRL-1.GP0
N$86  (via drill 0.35)
  Top 0.406: U$1.B30 47.27,50.37 47.27,52.3 47.7,52.73 49.73,52.73 55,58 v55,74
  Bottom 0.406: v55,74 53.64,75.36 53.64,78.27 53.04,78.87 51.1,78.87 46.19,83.77 SIG_FROM_CTRL-1.GP1
N$87  (via drill 0.35)
  Top 0.406: v45.73,53.23 45.98,53.23 46.6,53.85 48.85,53.85 53.12,58.12 53.12,74.29 54.93,76.1 54.93,86.83 v55.1,87
  Bottom 0.406: v45.73,53.23 45.73,52.33 45.21,51.81 45.21,49.95 44.65,49.39 42.79,49.39 U$1.A29 | v55.1,87 54.56,87.54 54.56,88.23 52.39,90.4 52.39,91.19 51.73,91.85 50.81,91.85 49.69,90.73 SIG_FROM_CTRL-1.GP2
N$88  (via drill 0.35)
  Top 0.406: v51,65 52.56,66.56 52.56,74.52 53.64,75.6 53.64,82.64 v54,83
  Bottom 0.406: v51,65 40.56,54.56 40.56,51.9 40.71,51.75 40.71,50.95 39.75,49.99 U$1.A30 | v54,83 54,88 SIG_FROM_CTRL-1.GP3
VCC
  pour Route15: 0,98 61,98 61,0 0,0
  pour Bottom: 0,98 61,98 61,0 0,0

## Text on the board
tNames: DB I | DB O | ADDR I | ADDR O | CLK | CLR | INVERTED | NORMAL | Backplane - V1 / HS Compute / RGarman